# Altium PCB transformer.PcbDoc (part 1 of 3)
Units mm, origin at the board's own origin, x right, y up, seen from the top; angles counter-clockwise.
Board outline 350 x 350 mm, 3 copper layers (GND Top, Middle Layer, GND Bottom), stack 0.497 mm thick; 13 components, 13 nets, 121 pads, 5535 vias.
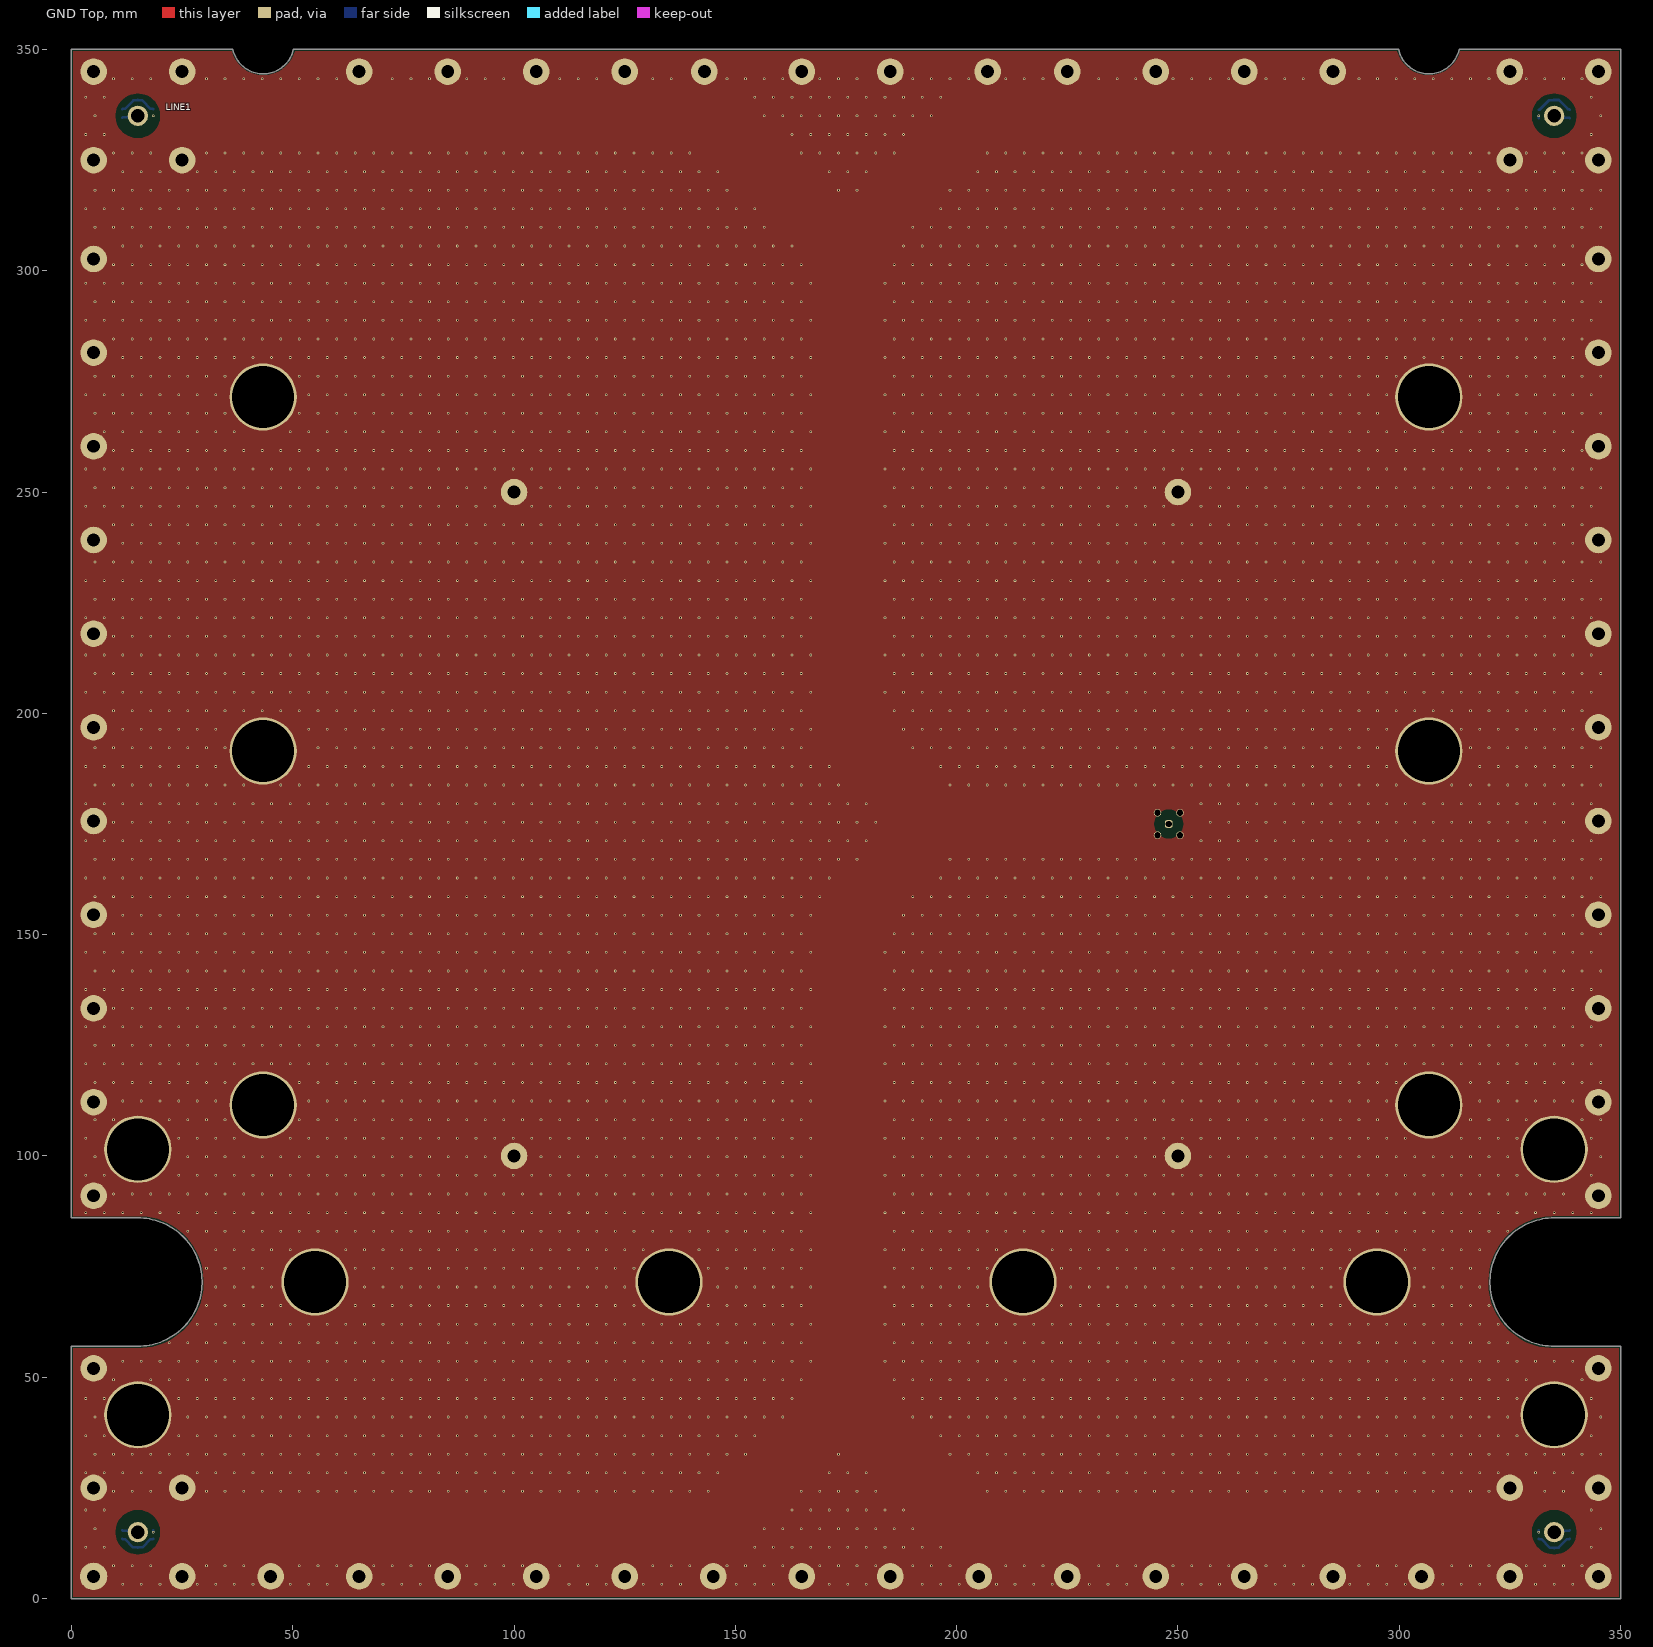
[diagram p0: GND Top view]
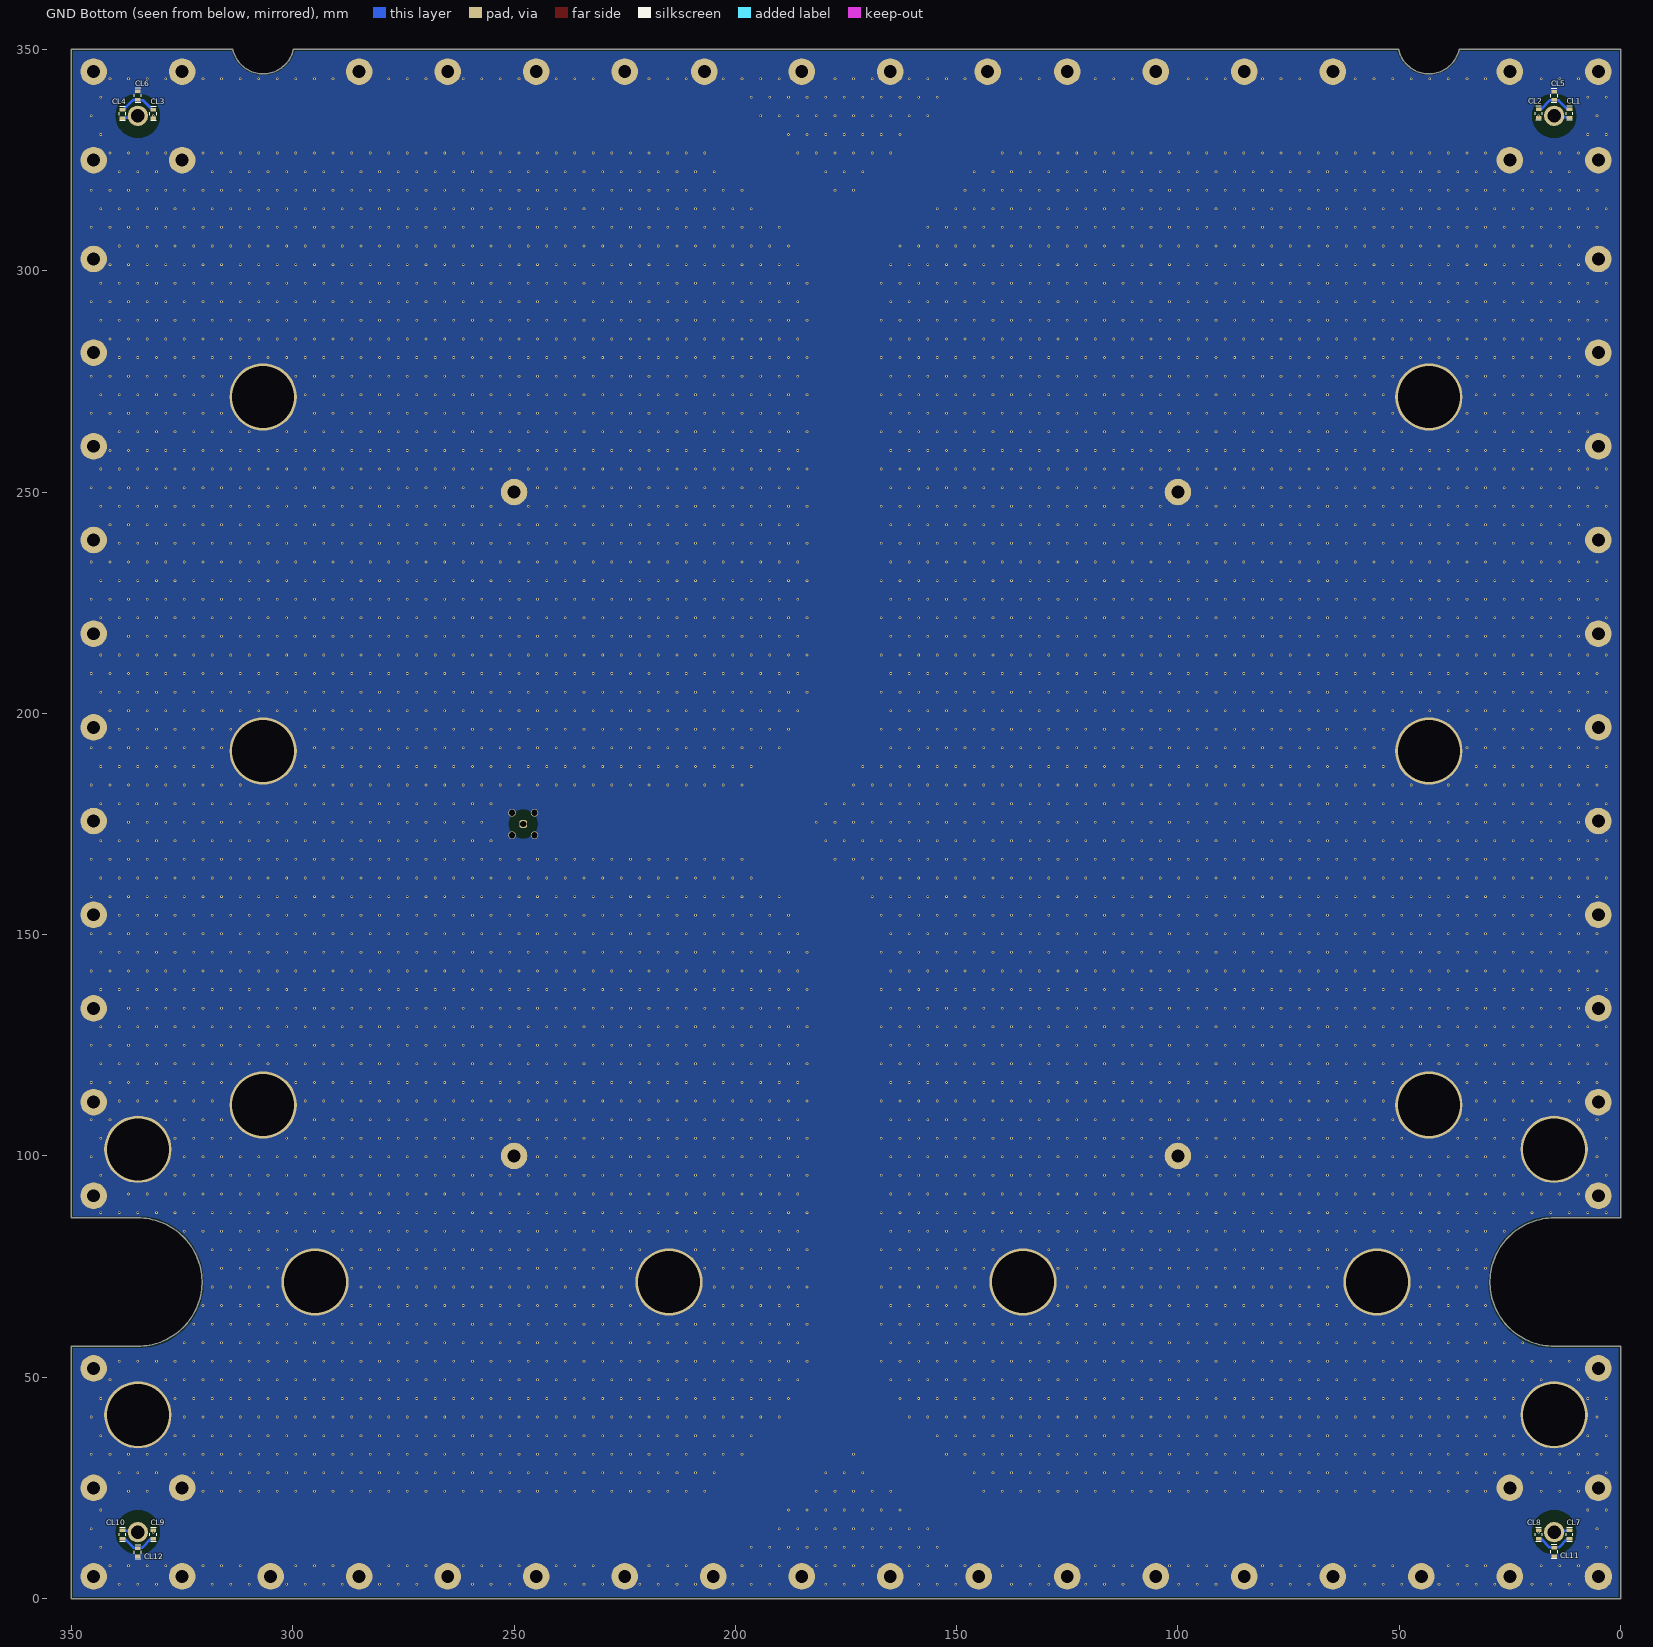
[diagram p1: GND Bottom view, seen from below]
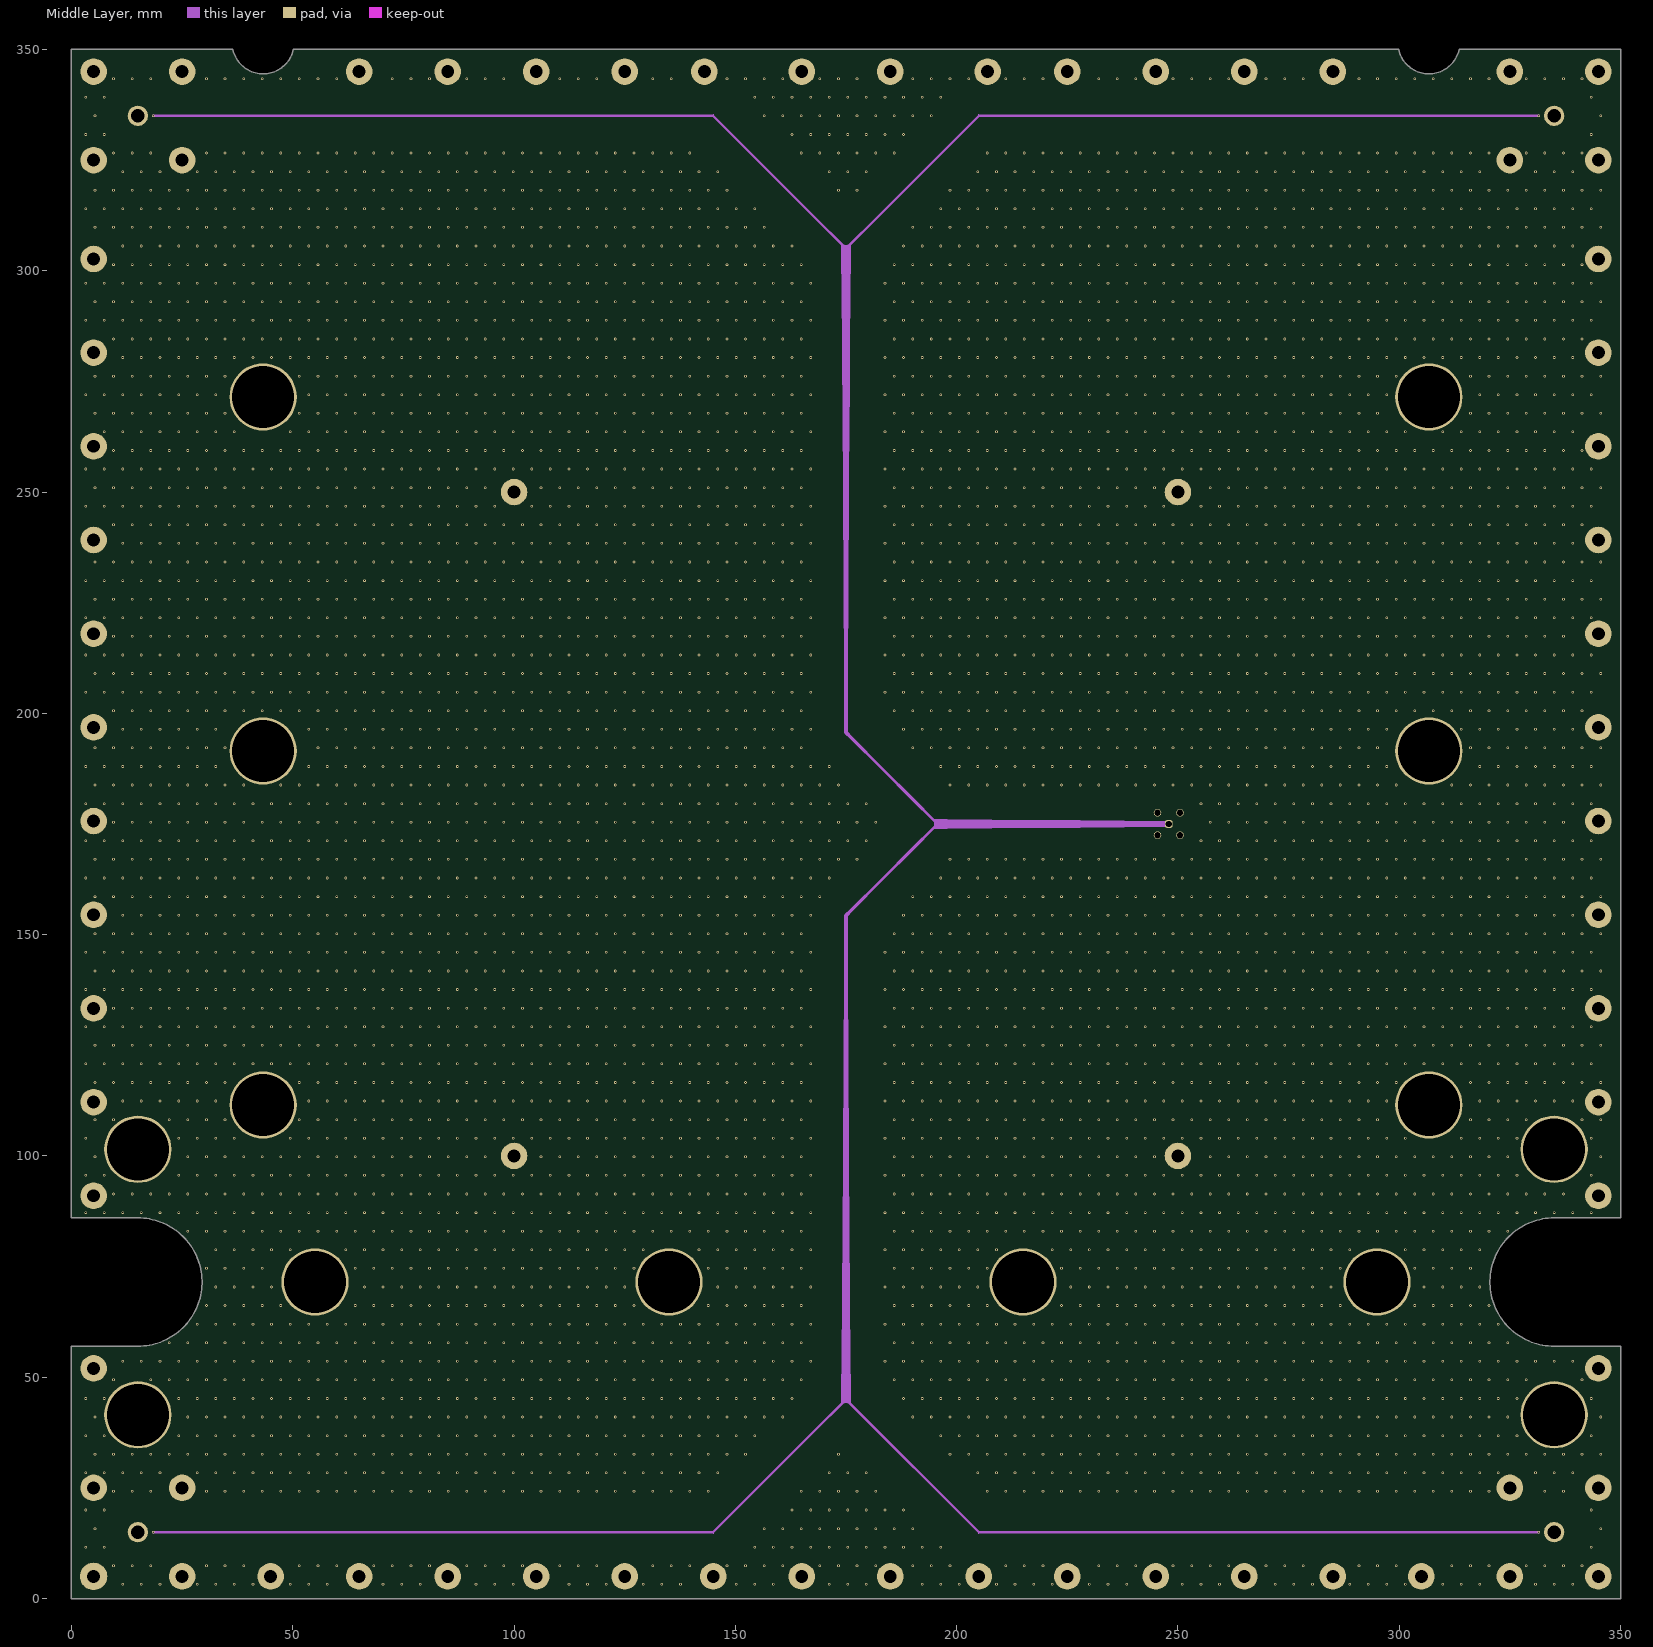
[diagram p2: Middle Layer]
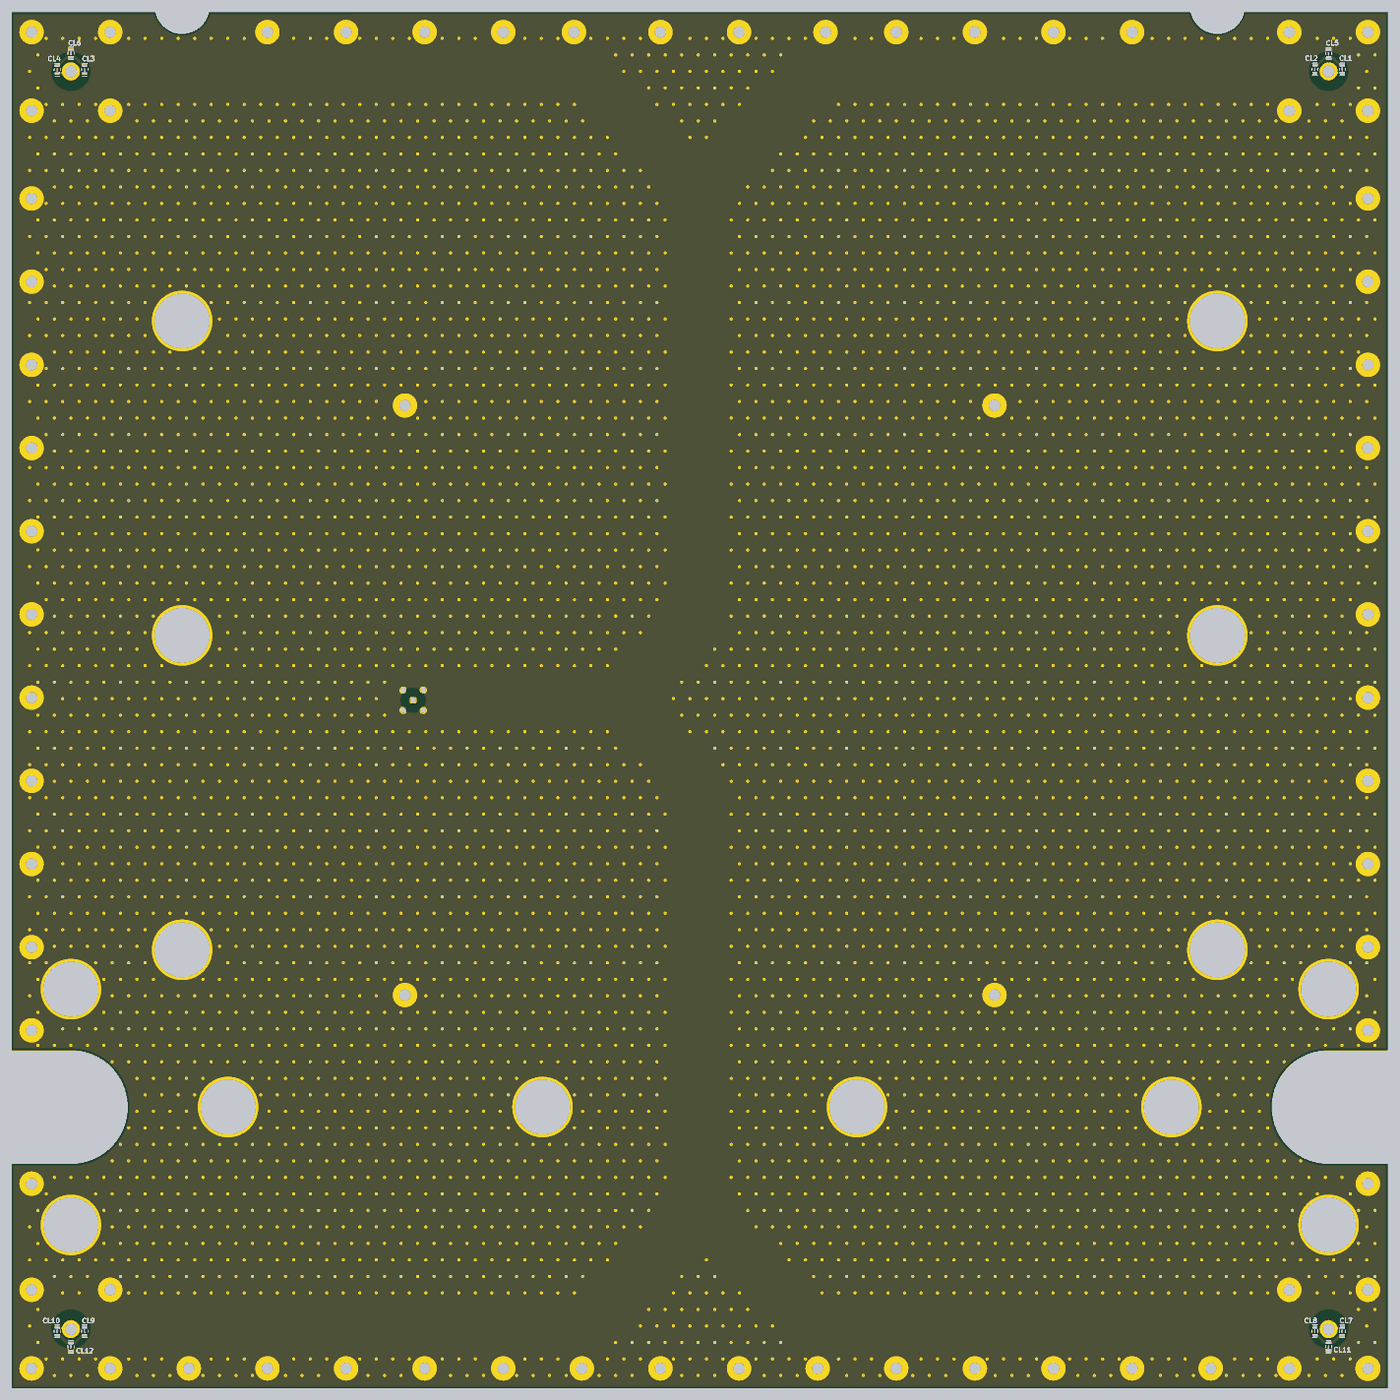
[diagram p5: 3D render of the assembled board from below, using the file's embedded part models]

## Layer stack, top to bottom
Top Solder: solder mask 0.0102, Solder Resist, Dk 3.5
GND Top: signal copper 0.035
Dielectric 2: prepreg 0.0711, PP-006, Dk 4.1
Middle Layer: signal copper 0.0356
Dielectric 1: dielectric 0.32, FR-4, Dk 4.8
GND Bottom: signal copper 0.0356
Bottom Solder: solder mask 0.0102, Solder Resist, Dk 3.5

## Board outline
0,0 350,0 350,57 335,57 cw(c335,71.5) 335,86 350,86 350,350 313.537,350 cw(c306.7,351.5) 299.863,350 50.137,350 cw(c43.3,351.5) 36.463,350 0,350 0,86 15,86 cw(c15,71.5) 15,57 0,57

## Design rules (kind name [scope] priority, off if disabled: settings)
Clearance "Stitching GND" [IsStitchingVia and InNet('GND') vs (IsVia and (Not IsStitchingVia)) Or IsPad] p1: gap=0.127 ignorepadtopadclearanceinfootprint=FALSE except(0.5: SMDPad-Via THPad-Via; 6.5: Via-Fill Via-Poly Via-Region)
Clearance [All] p2: gap=0.2 ignorepadtopadclearanceinfootprint=FALSE except(0.5: SMDPad-Via THPad-Via)
PlaneClearance [All] p1: clearance=0.5
PolygonConnect [All] p1: connectstyle=Direct reliefconductorwidth=0.254 reliefentries=4 polygonreliefangle="90 Angle" airgapwidth=0.254
RoutingVias [All] p1: holewidth=0.711 width=1.27 viastyle="Through Hole" minholewidth=0.3 minwidth=0.3 maxholewidth=10 maxwidth=2
SolderMaskExpansion [All] p1: expansion=0.102 istentingtop=FALSE
Width [All] p1: maxlimit=1 minlimit=0.254 preferedwidth=0.254
29 further rules are at their usual default settings.

## Classes and differential pairs
component class transformer: CL1 CL2 CL3 CL4 CL5 CL6 CL7 CL8 CL9 CL10 CL11 CL12

## Components (designator, comment, footprint, x,y, rotation, side; value= is the part's Value field where it differs from the comment)
CL1 "CL_component" RESISTOR 11.5,334.6 r90 bottom
CL2 "CL_component" RESISTOR 18.5,336.5 r270 bottom
CL3 "CL_component" RESISTOR 331.5,334.5 r90 bottom
CL4 "CL_component" RESISTOR 338.5,336.4 r270 bottom
CL5 "CL_component" RESISTOR 15,340.5 r270 bottom
CL6 "CL_component" RESISTOR 335,340.55 r270 bottom
CL7 "CL_component" RESISTOR 11.5,15.4 r270 bottom
CL8 "CL_component" RESISTOR 18.5,13.5 r90 bottom
CL9 "CL_component" RESISTOR 331.5,15.4 r270 bottom
CL10 "CL_component" RESISTOR 338.5,13.5 r90 bottom
CL11 "CL_component" RESISTOR 15,9.6 r90 bottom
CL12 "CL_component" RESISTOR 335,9.5 r90 bottom
LINE1 "LINE" LINE 0,0 r0 top

## Footprints (in the part's own frame and the unit in brackets; to place one, negate y for a bottom-side part, rotate by r counter-clockwise, add the part's x,y. Pads: shape width x height; smd on the part's side, far side on the other; paste and mask are expansions set on the pad)
LINE [mm]
  round 0.6 hole 0.3: 1(18.5,15) 1(18.5,335) 1(331.5,15) 1(331.5,335)
  rrect50% 1.7x1.7 hole 1.4: 1(247.925,175)
  round 1.7 hole 1.4: 2(245.385,172.46) 2(245.385,177.54) 2(250.465,172.46) 2(250.465,177.54)
  Middle Layer region: 18.5,14.77 18.4,14.793 18.32,14.857 18.276,14.949 18.276,15.051 18.32,15.143 18.4,15.207 18.5,15.23 18.5,15.23 144.905,15.23 173.95,44.275 173.95,45.809 174.04,55.809 174.12,65.809 174.26,85.809 174.332,95.809 174.4,105.809 174.46,115.809 174.51,125.809 174.57,135.809 174.62,145.809 174.65,154.322 174.677,154.457 174.754,154.571 174.754,154.571 175.813,155.616 182.915,162.656 190.015,169.699 194.628,174.26 194.856,174.599 194.937,175 194.856,175.401 194.628,175.74 194.628,175.74 190.015,180.301 182.915,187.344 175.813,194.384 174.754,195.429 174.677,195.543 174.65,195.678 174.65,195.678 174.62,204.191 174.57,214.191 174.51,224.191 174.46,234.191 174.4,244.191 174.332,254.191 174.26,264.191 174.12,284.191 174.04,294.191 173.95,304.191 173.95,305.725 144.905,334.77 18.5,334.77 18.4,334.793 18.32,334.857 18.276,334.949 18.276,335.051 18.32,335.143 18.4,335.207 18.5,335.23 18.5,335.23 145,335.23 145.088,335.213 145.163,335.163 145.163,335.163 168.662,311.663 174.275,306.05 174.74,305.818 175.26,305.818 175.725,306.05 175.725,306.05 181.338,311.663 204.837,335.163 204.912,335.212 205,335.23 205,335.23 331.5,335.23 331.615,335.199 331.699,335.115 331.73,335 331.699,334.885 331.615,334.801 331.5,334.77 331.5,334.77 205.095,334.77 181.663,311.338 176.05,305.725 176.05,304.191 175.96,294.191 175.88,284.191 175.81,274.191 175.74,264.191 175.668,254.191 175.6,244.191 175.54,234.191 175.49,224.191 175.43,214.191 175.38,204.191 175.35,195.824 176.294,194.865 183.334,187.763 190.376,180.663 194.938,176.05 195.678,176.05 197.925,176.035 207.925,175.952 217.925,175.872 227.925,175.797 237.925,175.726 247.925,175.659 248.211,175.594 248.44,175.411 248.567,175.147 248.567,174.853 248.44,174.589 248.211,174.406 247.925,174.341 247.925,174.341 237.925,174.274 227.925,174.203 217.925,174.128 207.925,174.048 197.925,173.965 195.678,173.95 194.938,173.95 190.376,169.337 183.334,162.237 176.294,155.135 175.35,154.176 175.38,145.809 175.43,135.809 175.49,125.809 175.54,115.809 175.6,105.809 175.668,95.809 175.74,85.809 175.88,65.809 175.96,55.809 176.05,45.809 176.05,44.275 205.095,15.23 331.5,15.23 331.6,15.207 331.68,15.143 331.724,15.051 331.724,14.949 331.68,14.857 331.6,14.793 331.5,14.77 331.5,14.77 205,14.77 204.912,14.788 204.837,14.837 204.837,14.837 175.725,43.95 175.26,44.182 174.74,44.182 174.275,43.95 174.275,43.95 168.662,38.337 145.163,14.837 145.088,14.787 145,14.77 145,14.77
RESISTOR [mm]
  rect 0.8x1.3 smd: 1(0,0) 2(1.9,0)
  silkscreen extent -0.64,-0.76 2.54,0.76, body extent -0.05,-0.62 1.95,0.63, height 0.43

## Free pads (board coordinates)
  round 6.2 hole 2.9: 1(5,5)
  round 6 hole 2.9: 1(5,25) 1(5,52) 1(5,91) 1(5,112.167) 1(5,133.333) 1(5,154.5) 1(5,175.667) 1(5,196.833) 1(5,218) 1(5,239.167) 1(5,260.333) 1(5,281.5) 1(5,302.667) 1(5,325) 1(5,345) 1(25,5) 1(25,25) 1(25,325) 1(25,345) 1(45,5) 1(65,5) 1(65,345) 1(85,5) 1(85,345) 1(100,100) 1(100,250) 1(105,5) 1(105,345) 1(125,5) 1(125,345) 1(143,345) 1(145,5) 1(165,5) 1(165,345) 1(185,5) 1(185,345) 1(205,5) 1(207,345) 1(225,5) 1(225,345) 1(245,5) 1(245,345) 1(250,100) 1(250,250) 1(265,5) 1(265,345) 1(285,5) 1(285,345) 1(305,5) 1(325,5) 1(325,25) 1(325,325) 1(325,345) 1(345,5) 1(345,25) 1(345,52) 1(345,91) 1(345,112.167) 1(345,133.333) 1(345,154.5) 1(345,175.667) 1(345,196.833) 1(345,218) 1(345,239.167) 1(345,260.333) 1(345,281.5) 1(345,302.667) 1(345,325) 1(345,345)
  round 15.2 hole 14: 1(15,41.5) 1(15,101.5) 1(43.3,111.5) 1(43.3,191.5) 1(43.3,271.5) 1(55,71.5) 1(135,71.5) 1(215,71.5) 1(295,71.5) 1(306.7,111.5) 1(306.7,191.5) 1(306.7,271.5) 1(335,41.5) 1(335,101.5)
  round 4.6 hole 3: 2(15,15) 2(15,335) 2(335,15) 2(335,335)

## Via types
v1: diameter 0.6/0.6/0.6 (per signal layer), hole 0.3, GND Top to GND Bottom, 5535 vias

## Nets (pads, with @x,y where several pads share a name; then routed paths per layer and width w, separated by ;. In a path a pad name is that pad's centre, name@x,y a point inside that pad or via, vN(x,y) a via of type N, cw(c..) or ccw(c..) an arc to the next point about the centre after c; other vN are vias at no path point)
GND: CL5.1 CL6.1 CL11.1 CL12.1 LINE1.2 pad.1